# Altium PCB triumvi_integrated.PcbDoc (part 1 of 2)
Units mil, origin at the board's own origin, x right, y up, seen from the top; angles counter-clockwise.
Board outline 3610.03 x 1060.03 mil, 6 copper layers (Top Layer, GND, Signal Layer 2, VCC, GND (Mid4), Bottom Layer), stack 48.468 mil thick; 157 components, 128 nets, 572 pads, 236 vias.
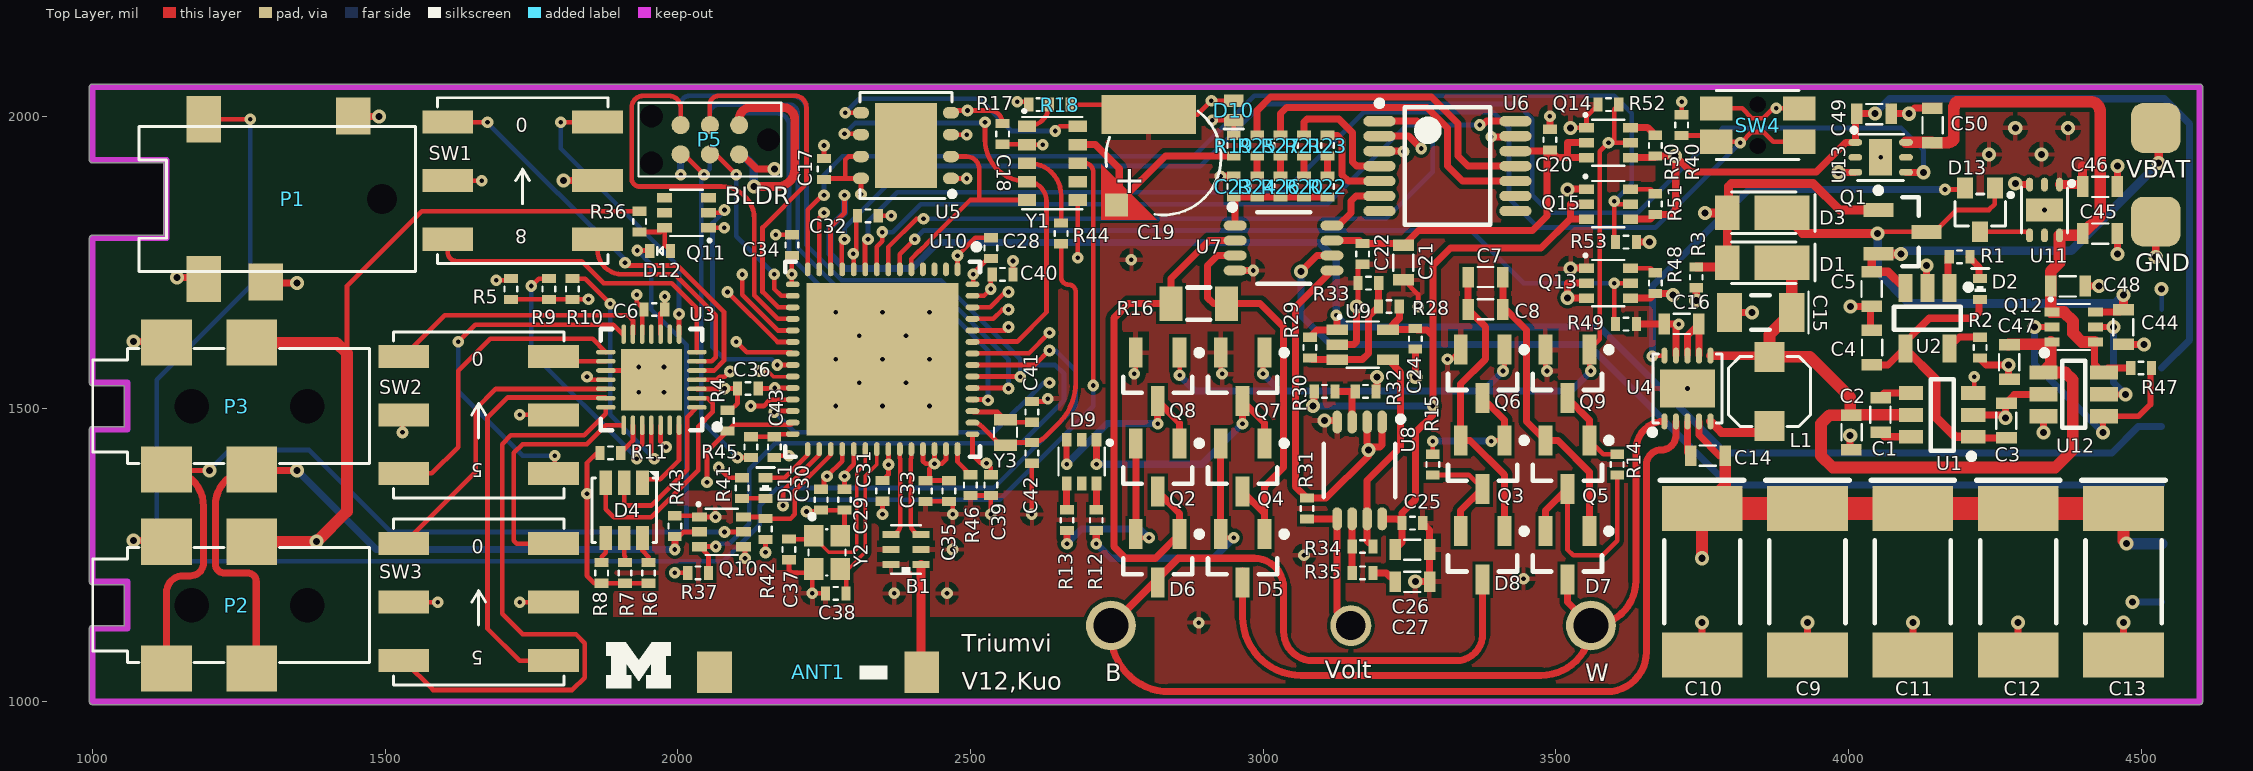
[diagram p0: Top Layer view]
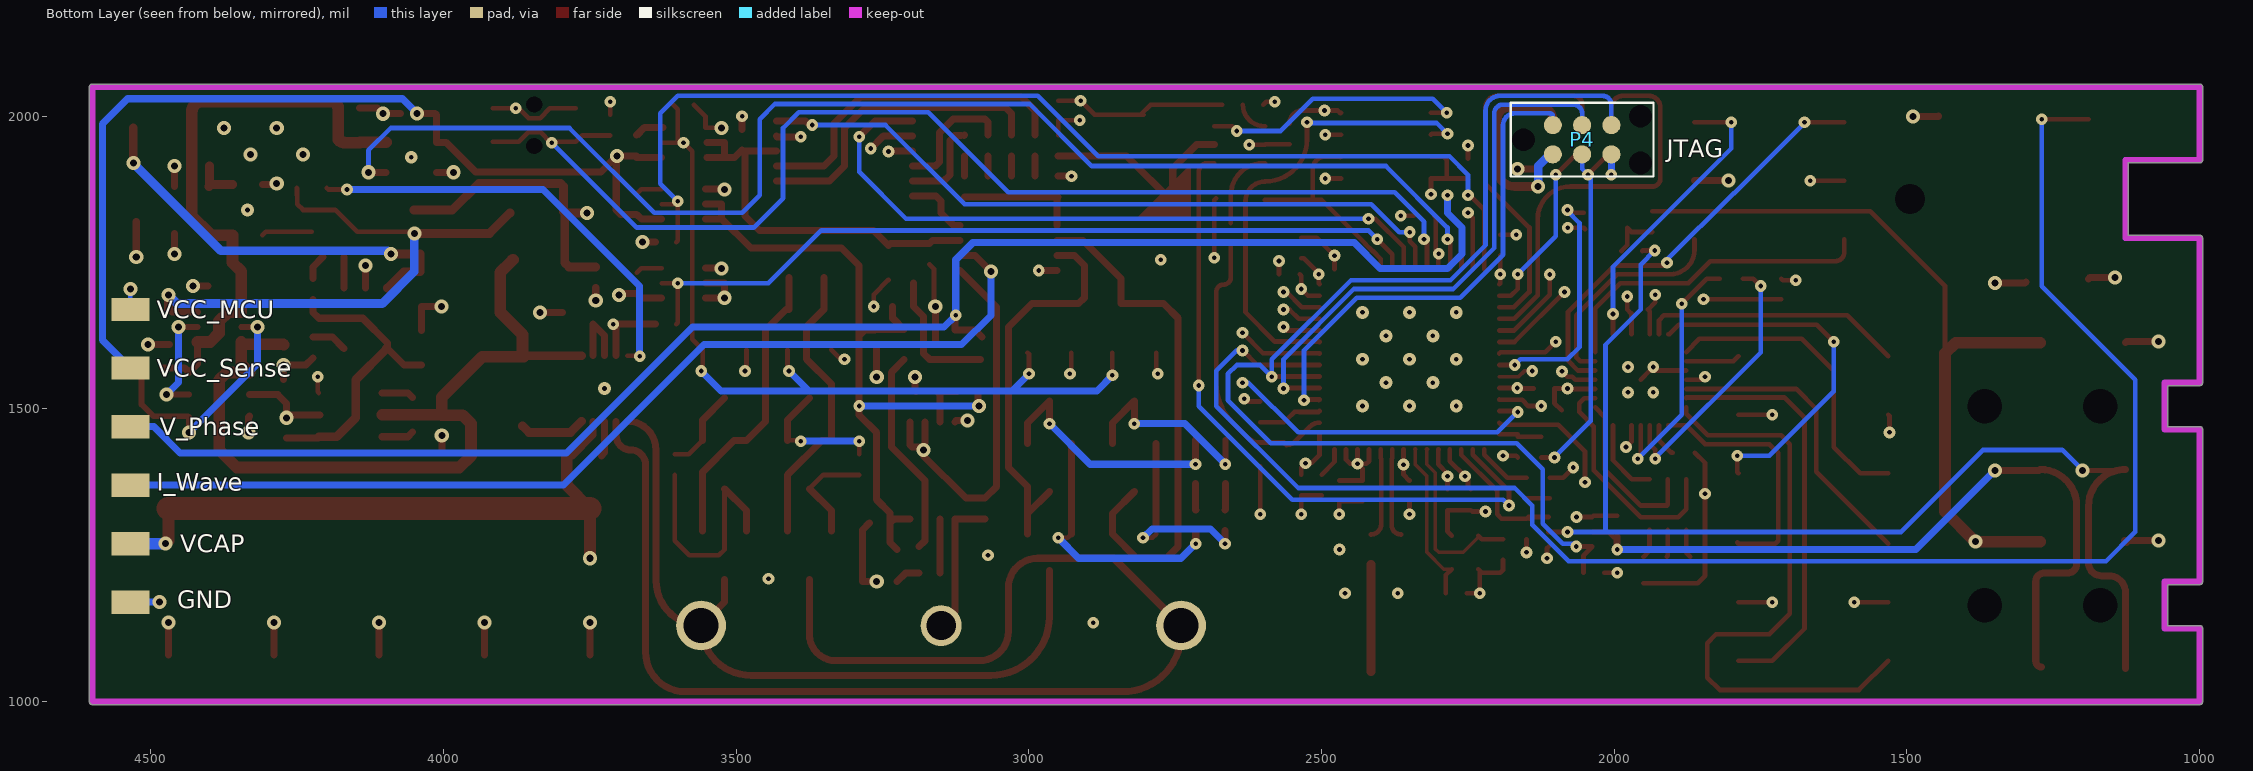
[diagram p1: Bottom Layer view, seen from below]
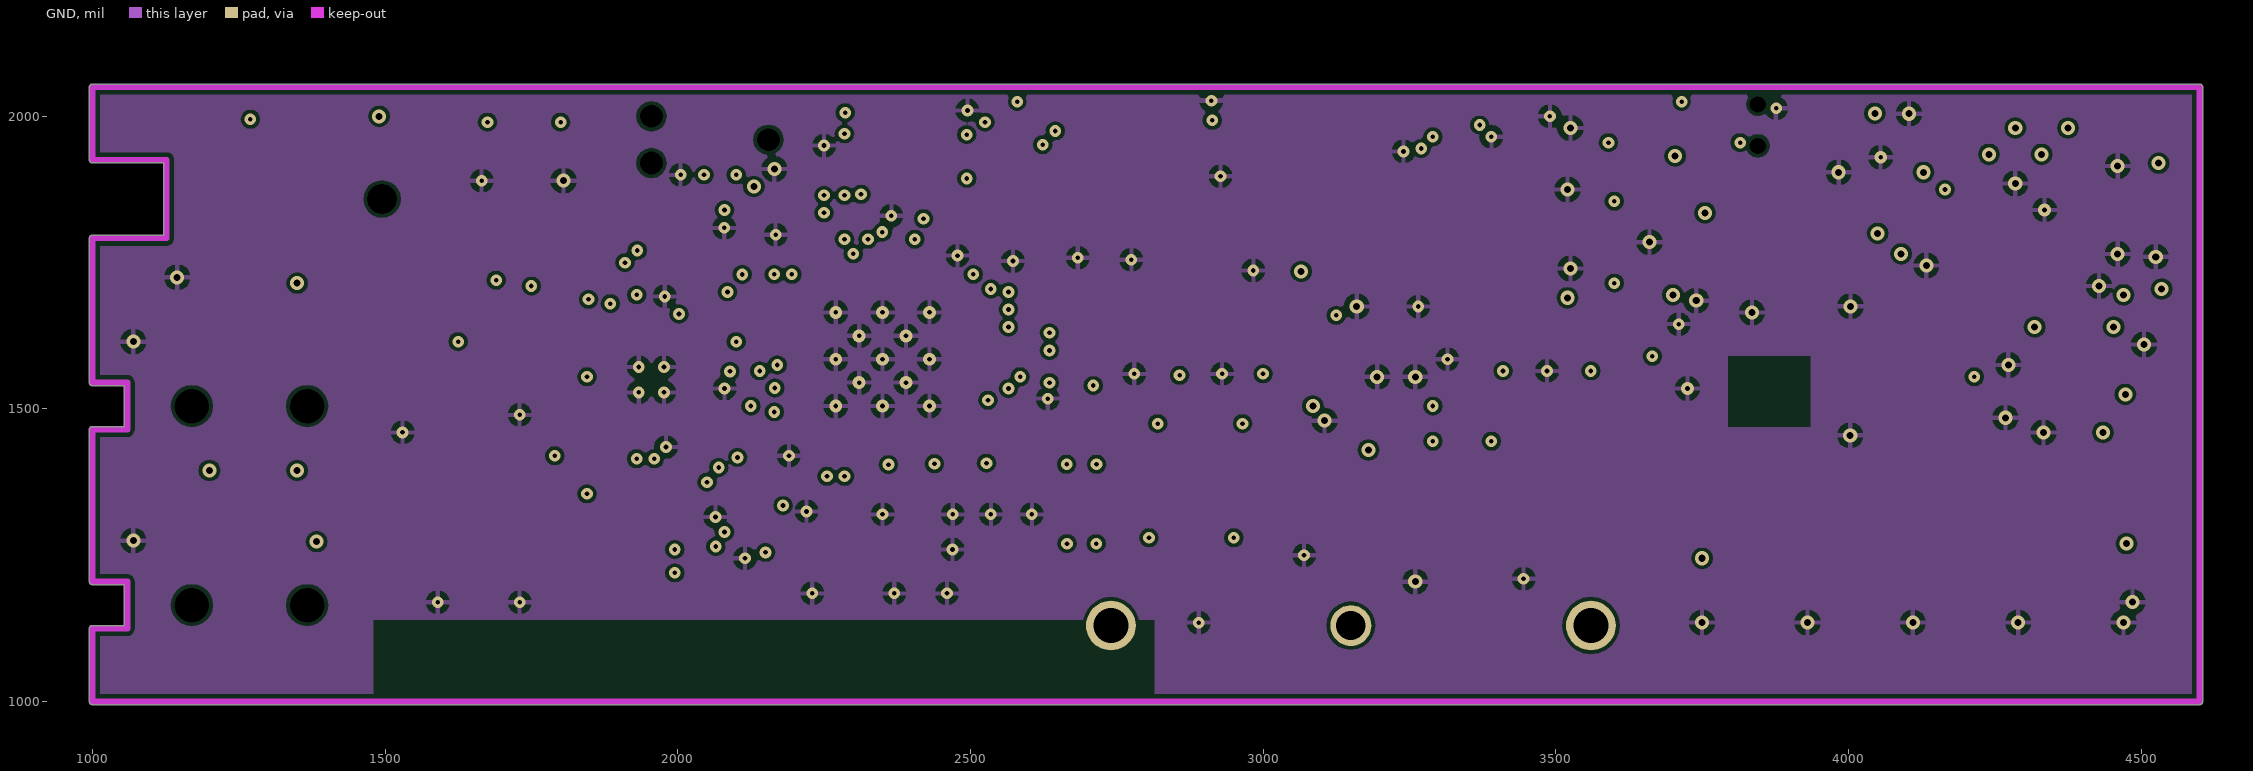
[diagram p2: GND]
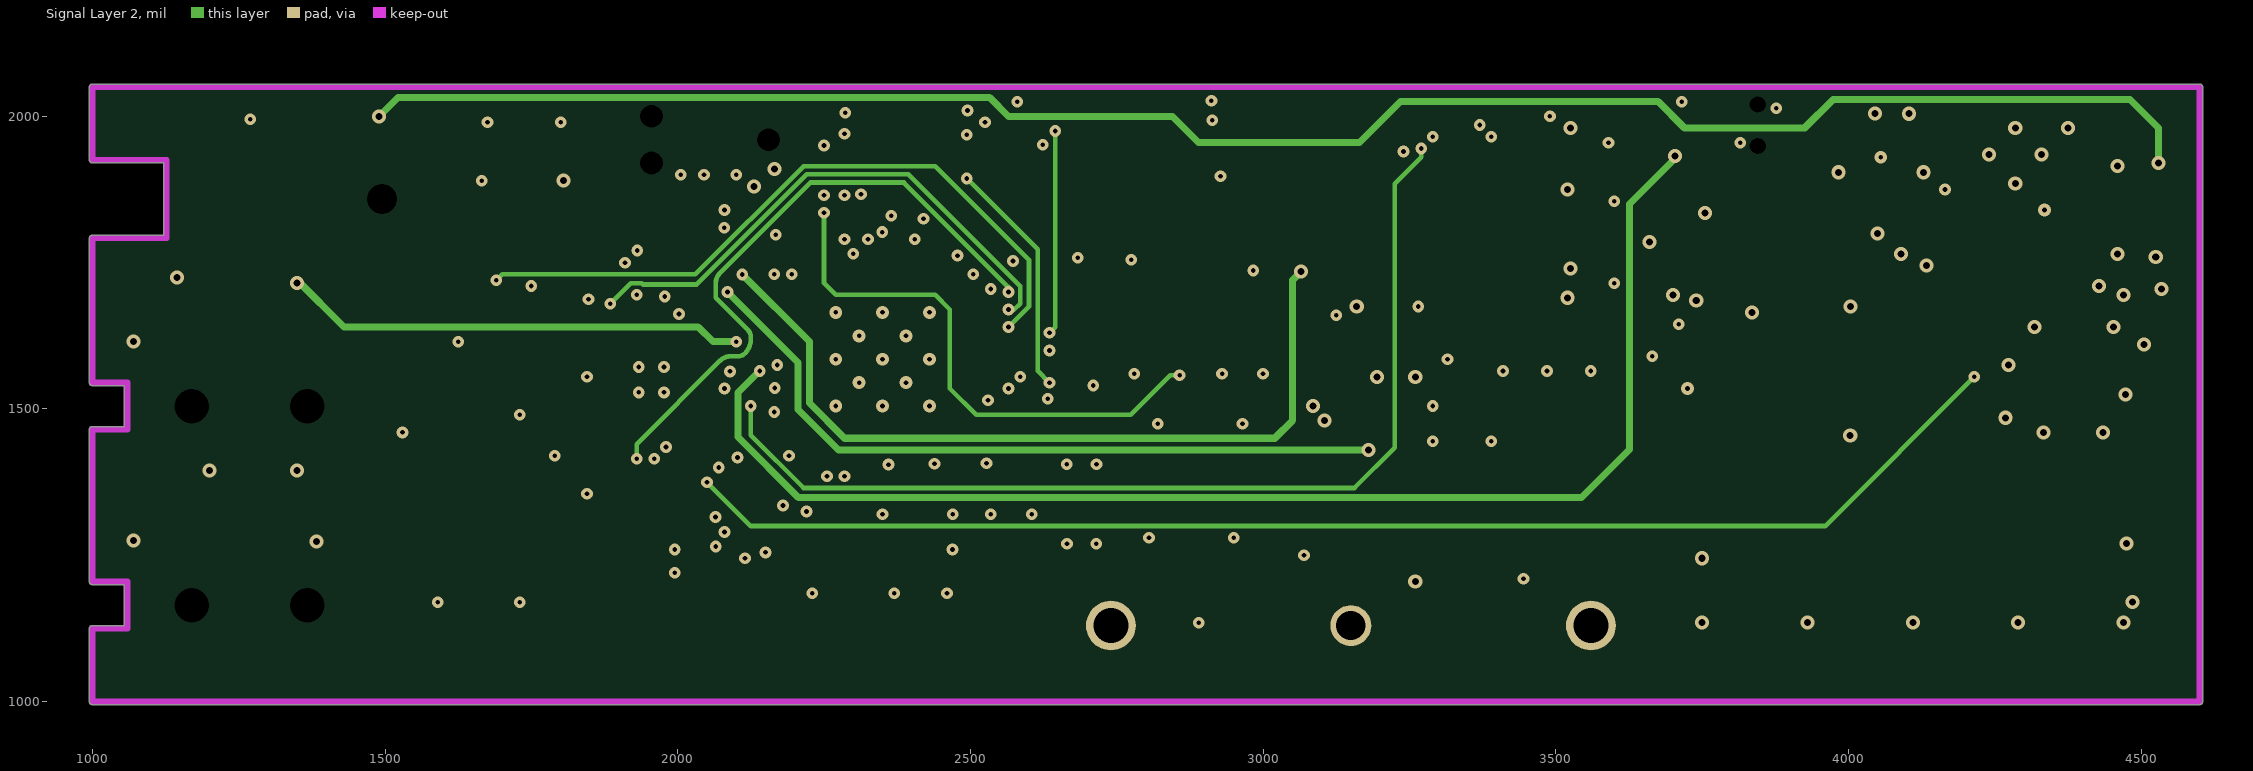
[diagram p3: Signal Layer 2]
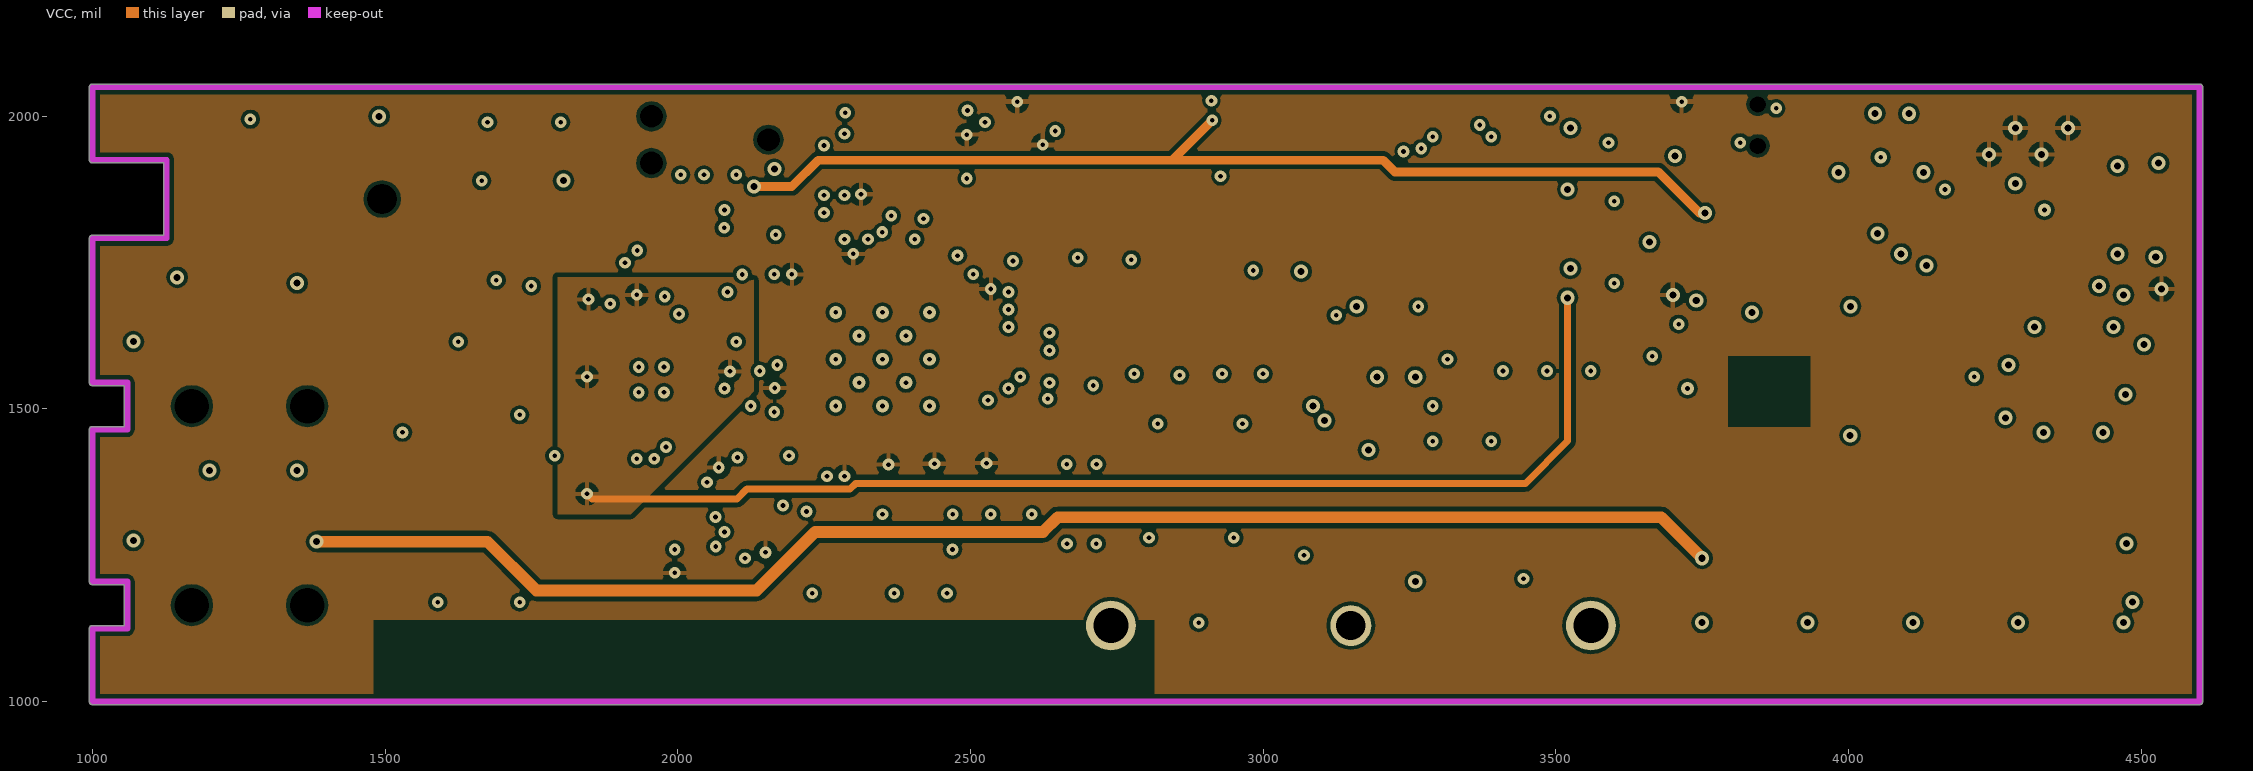
[diagram p4: VCC]
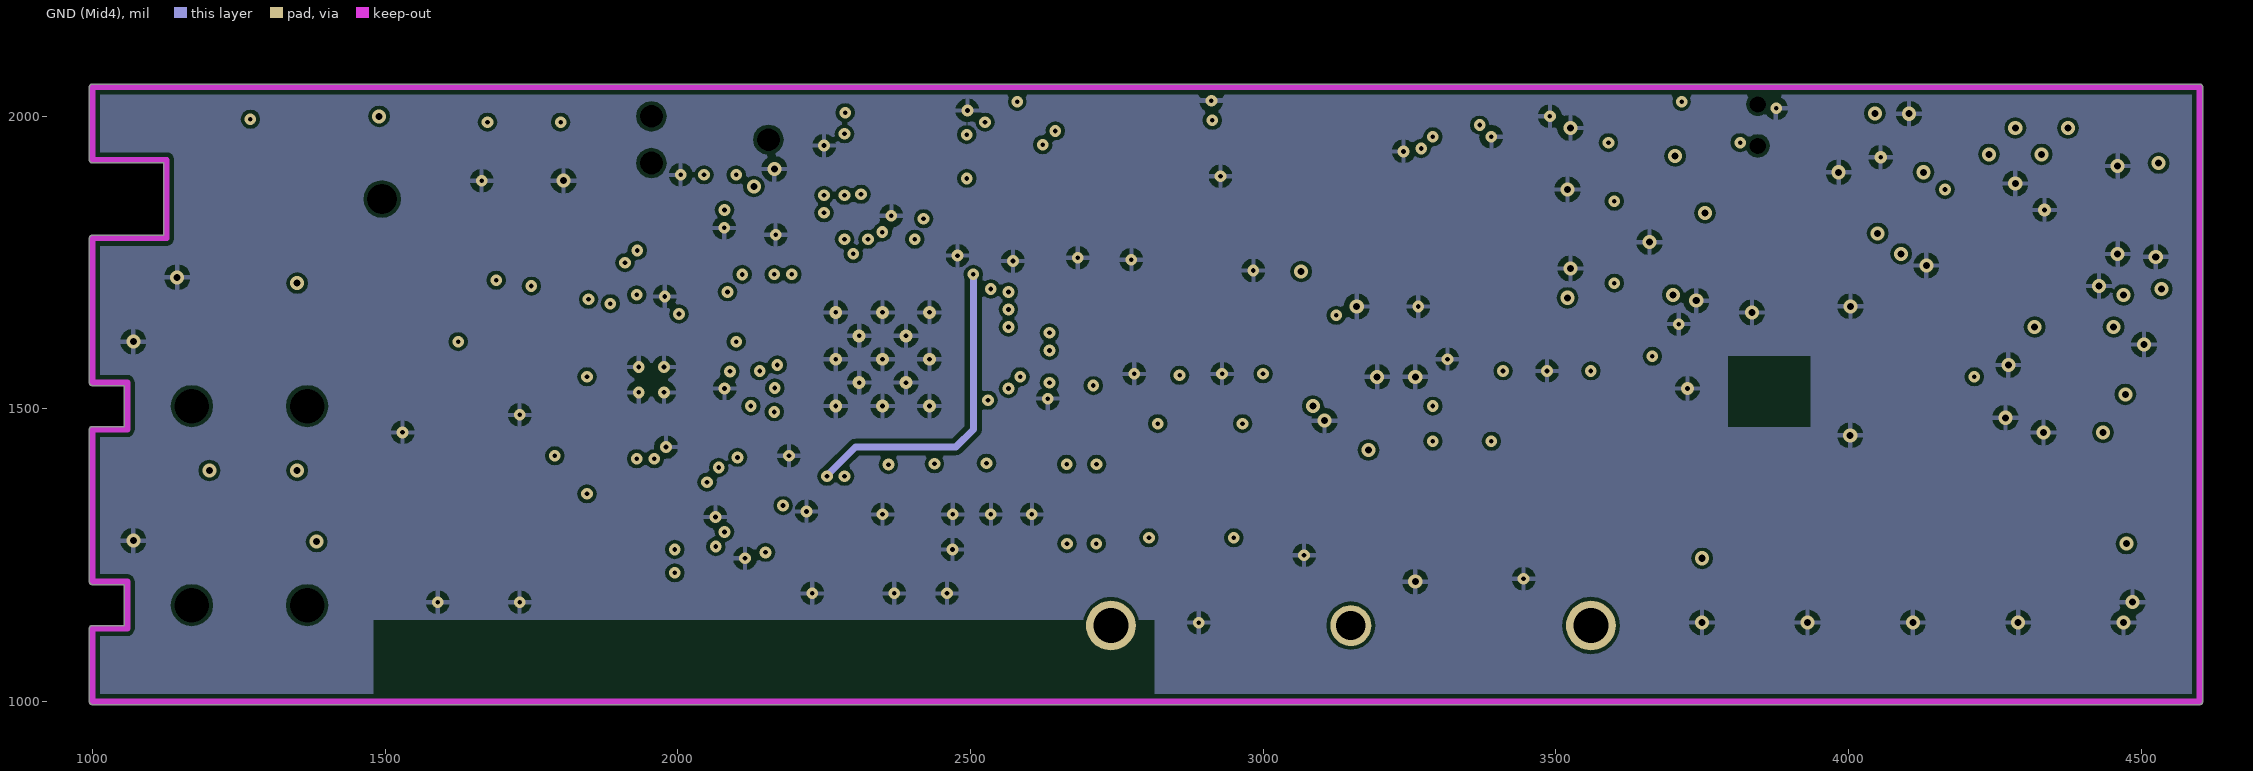
[diagram p5: GND (Mid4)]

## Layer stack, top to bottom
Top Solder: solder mask 0.4, Solder Resist, Dk 3.5
Top Layer: signal copper 1.4
Dielectric 1: core 10, FR-4, Dk 4.2
GND: signal copper 1.417
Dielectric 3: prepreg 5, Dk 4.2
Signal Layer 2: signal copper 1.417
Dielectric 4: core 10, Dk 4.2
VCC: signal copper 1.417
Dielectric 5: prepreg 5, Dk 4.2
GND (Mid4): signal copper 1.417
Dielectric 2: core 10, Dk 4.2
Bottom Layer: signal copper 1.4
Bottom Solder: solder mask 0.4, Solder Resist, Dk 3.5

## Board outline
1000,994.99 cw(c1000,1000) 994.99,1000 994.99,1125 cw(c1000,1125) 1000,1130.02 1054.75,1130.02 1054.75,1199.98 1000,1199.98 cw(c1000,1205) 994.99,1205 994.99,1465 cw(c1000,1465) 1000,1470.02 1054.75,1470.02 1054.75,1539.98 1000,1539.98 cw(c1000,1545) 994.99,1545 994.99,1791.65 cw(c1000,1791.65) 1000,1796.67 1121.99,1796.67 1121.99,1920.5 1000,1920.5 cw(c1000,1925.51) 994.99,1925.51 994.99,2050 cw(c1000,2050) 1000,2055.01 4600,2055.01 cw(c4600,2050) 4605.02,2050 4605.02,1000 cw(c4600,1000) 4600,994.99

## Design rules (kind name [scope] priority, off if disabled: settings)
Clearance "non plated holes" [InPadClass('NPHOLES')] p1: gap=10 // Sunstone Circuits Minimum Clearance Rule (MLB~4&6 Layer Designs)
Clearance "Clearance~Sunstone Circuits" [All] p2: gap=6 except(8: Track-Poly Poly-Poly) // Sunstone Circuits Minimum Clearance Rule (MLB~4&6 Layer Designs)
DiffPairsRouting [All] p1: maxlimit=10 minlimit=10 mostfreqgap=10 toplayer_minwidth=6 toplayer_maxwidth=15 toplayer_prefwidth=15 midlayer1_minwidth=6 midlayer1_maxwidth=15 midlayer1_prefwidth=15 midlayer2_minwidth=6 midlayer2_maxwidth=15 midlayer2_prefwidth=15 midlayer3_minwidth=15 midlayer3_maxwidth=15 midlayer3_prefwidth=15 midlayer4_minwidth=15 midlayer4_maxwidth=15 midlayer4_prefwidth=15 bottomlayer_minwidth=6 bottomlayer_maxwidth=15 bottomlayer_prefwidth=15 maxuncoupledlength=500
HoleSize "HoleSize~Sunstone Circuits" [All] p1: absolutevalues=TRUE maxlimit=251 minlimit=8 maxpercent=80.000 minpercent=20.000 // Sunstone Circuits Hole Size Rule (MLB~4&6 Layer Designs)
HoleSize Testpoint [All] p2: absolutevalues=TRUE maxlimit=100 minlimit=1 maxpercent=80.000 minpercent=20.000
HoleSize TestPointUsage [All] p3: absolutevalues=TRUE maxlimit=100 minlimit=1 maxpercent=80.000 minpercent=20.000
MinimumAnnularRing "MinimumAnnularRing~Sunstone Circuits" [All] p1 off: minimumring=7 // Sunstone Circuits Minimum Annular Ring (MLB~4&6 Layer Designs)
MinimumSolderMaskSliver [All] p1 off: minsoldermaskwidth=10
PlaneClearance "PlaneClearance~Sunstone Circuits" [All] p1: clearance=12 // Sunstone Circuits Power Plane Clearance Rule (MLB~4&6 Layer Designs)
PlaneConnect "PlaneConnect~Sunstone Circuits" [All] p1: planeconnectstyle=Relief reliefexpansion=10 reliefentries=4 reliefconductorwidth=8 reliefairgap=10 // Sunstone Circuits Power Plane Connect Rule (MLB~4&6 Layer Designs)
PolygonConnect "PolygonConnect~Sunstone Circuits" [All] p1: connectstyle=Relief reliefconductorwidth=8 reliefentries=4 polygonreliefangle="90 Angle" airgapwidth=10 // Sunstone Circuits Polygon Connect Style (MLB~4&6 Layer Designs)
RoomDefinition U_programming_header [InComponentClass('U_programming_header')] p1 off: confinementstyle=ConfineIn formatcopy=TRUE lockcomponents=FALSE outline 1920.98,1885.04 1920.98,2034.96 2189.02,2034.96 2189.02,1885.04
RoomDefinition U_power_generation [InComponentClass('U_power_generation')] p2 off: confinementstyle=ConfineIn formatcopy=TRUE lockcomponents=FALSE outline 3517.01,1653.82 3517.01,2017.44 3547.52,2017.44 3547.52,2048.7 3632.48,2048.7 3632.48,2040.67 4177.91,2040.67 4177.91,1914.61 4486.26,1914.61 4486.26,1696.26 4504.61,1696.26 4504.61,1598.7 4542.48,1598.7 4542.48,1541.3 4473.59,1541.3 4473.59,1447.09 4296.41,1447.09 4296.41,1523.74 4240.39,1523.74 4240.39,1616.3 3577.52,1616.3 3577.52,1653.82
RoomDefinition U_fram_rtc [InComponentClass('U_fram_rtc')] p3 off: confinementstyle=ConfineIn formatcopy=TRUE lockcomponents=FALSE outline 2221.3,1867.52 2221.3,1952.48 2286.45,1952.48 2286.45,2053.05 2493.55,2053.05 2493.55,2050.56 2979.73,2050.56 2979.73,1966 2978.7,1966 2978.7,1907.52 2940.93,1907.52 2940.93,1813.7 2710.7,1813.7 2710.7,1829.29 2567.95,1829.29 2567.95,1846.95 2286.45,1846.95 2286.45,1867.52
RoomDefinition U_charging [InComponentClass('U_charging')] p4 off: confinementstyle=ConfineIn formatcopy=TRUE lockcomponents=FALSE outline 2056.3,1437.52 2056.3,1522.48 3711.3,1522.48 3711.3,1767.48 3759.3,1767.48 3759.3,1882.93 4003.66,1882.93 4003.66,1893.31 4181.14,1893.31 4181.14,1788.7 4232.48,1788.7 4232.48,1752.5 4253.7,1752.5 4253.7,1536.26 4304.61,1536.26 4304.61,1423.74 4246.82,1423.74 4246.82,1399.29 4073.18,1399.29 4073.18,1403.74 3970.39,1403.74 3970.39,1437.52
RoomDefinition U_mcu [InComponentClass('U_mcu')] p5 off: confinementstyle=ConfineIn formatcopy=TRUE lockcomponents=FALSE outline 1906.3,1777.52 1906.3,1862.48 1942.99,1862.48 1942.99,1896.18 3686.3,1896.18 3686.3,2027.48 3733.57,2027.48 3733.57,2081.61 3956.43,2081.61 3956.43,1913.44 3956.43,1757.52 2683.7,1757.52 2633.7,1757.52 2633.7,1457.52 2633.7,1377.52 2563.7,1377.52 2563.7,1327.52 2491.89,1327.52 2491.89,1317.25 2459.69,1317.25 2459.69,1000.63 2020.31,1000.63 2020.31,1191.3 1992.52,1191.3 1992.52,1257.52 1966.3,1257.52 1966.3,1741.3 1927.52,1741.3 1927.52,1777.52
RoomDefinition U_IV_sensing [InComponentClass('U_IV_sensing')] p6 off: confinementstyle=ConfineIn formatcopy=TRUE lockcomponents=FALSE outline 2900,1693.15 2900,1864.72 2921.3,1864.72 2921.3,1922.48 2961.3,1922.48 2961.3,1992.48 3151.46,1992.48 3151.46,2042.13 3478.54,2042.13 3478.54,2002.48 3518.7,2002.48 3518.7,1917.52 3478.54,1917.52 3478.54,1793.78 3311.26,1793.78 3311.26,1170.39 3198.74,1170.39 3198.74,1191.3 3127.52,1191.3 3127.52,1260 3083.15,1260 3083.15,1287.52 3046.3,1287.52 3046.3,1693.15
RoomDefinition U_energy_harvesting [InComponentClass('U_energy_harvesting')] p7 off: confinementstyle=ConfineIn formatcopy=TRUE lockcomponents=FALSE outline 3645.12,1440.35 3645.12,1622.76 3658.74,1622.76 3658.74,1679.61 3759.29,1679.61 3759.29,1714.37 3940.71,1714.37 3940.71,1627.65 3947.5,1627.65 3947.5,1393.23 4564.64,1393.23 4564.64,1020.79 3655.35,1020.79 3655.35,1440.35
RoomDefinition U_CT_switch [InComponentClass('U_CT_switch')] p8 off: confinementstyle=ConfineIn formatcopy=TRUE lockcomponents=FALSE outline 2636.3,1267.52 2636.3,1352.48 2638.66,1352.48 2638.66,1472.21 2739.13,1472.21 2739.13,1643.74 2804.21,1643.74 2804.21,1728.39 3323.74,1728.39 3323.74,1759.61 3436.26,1759.61 3436.26,1648.74 3610.71,1648.74 3610.71,1447.48 3633.7,1447.48 3633.7,1362.52 3610.71,1362.52 3610.71,1161.26 3055.71,1161.26 3055.71,1156.26 2739.13,1156.26 2739.13,1267.52
RoomDefinition U_config [InComponentClass('U_config')] p9 off: confinementstyle=ConfineIn formatcopy=TRUE lockcomponents=FALSE outline 987.26,1004.36 987.26,1665.64 1550.74,1665.64 1550.74,2044.23 1919.26,2044.23 1919.26,1698.7 2002.48,1698.7 2002.48,1663.35 2087.05,1663.35 2087.05,1436.65 1978.7,1436.65 1978.7,1187.52 1844.26,1187.52 1844.26,1015.77 1485.65,1015.77 1485.65,1004.36
RoutingVias "RoutingVias~Sunstone Circuits" [All] p1: holewidth=16 width=30 viastyle="Through Hole" minholewidth=6 minwidth=20 maxholewidth=20 maxwidth=40 // Sunstone Circuits Routing Vias Rule (MLB~4&6 Layer Designs)
ShortCircuit "ShortCircuit~Sunstone Circuits" [All] p1: allowed=FALSE // Sunstone Circuits Short Circuit Rule~Do Not Allow (MLB~4&6 Layer Designs)
SilkToSilkClearance [All] p1 off: silktosilkclearance=10
SilkToSolderMaskClearance [IsPad] p1 off: minsilkscreentomaskgap=10 clearancetoexposedcopper=TRUE
SolderMaskExpansion TentVias [isVia] p1: expansion=-20 // Sunstone Circuits Solder Mask Expansion Rule (MLB~4&6 Layer Designs)
SolderMaskExpansion "SolderMaskExpansion~Sunstone Circuits" [All] p2: expansion=3 // Sunstone Circuits Solder Mask Expansion Rule (MLB~4&6 Layer Designs)
ViasUnderSMD "ViasUnderSMD~Sunstone Circuits" [All] p1: allowed=FALSE // Sunstone Circuits Vias Under SMD~Do Not Allow (MLB~4&6 Layer Designs)
Width "Width~Sunstone Circuits" [All] p1: maxlimit=100 minlimit=6 preferedwidth=10 // Sunstone Circuits Minimum Width Rule (MLB~4&6 Layer Designs)
22 further rules are at their usual default settings.

## Classes and differential pairs
component class U_programming_header: P4 P5
component class U_power_generation: C44 C45 C46 C47 C48 C49 C50 D13 Q12 Q13 Q14 Q15 R47 R48 R49 R50 R51 R52 R53 U11 U12 U13
component class U_mcu: ANT1 B1 C28 C29 C30 C31 C32 C33 C34 C35 C36 C37 C38 C39 C40 C41 C42 C43 D11 D12 Q10 Q11 R36 R37 R40 R41 R42 R43 R44 R45 R46 SW4 U10 Y2 Y3
component class U_IV_sensing: C20 C21 C22 C23 C24 C25 C26 C27 R20 R21 R22 R23 R24 R25 R26 R27 R28 R29 R30 R31 R32 R33 R34 R35 U6 U7 U8 U9
component class U_fram_rtc: C17 C18 C19 D10 R17 R18 R19 U5 Y1
component class U_energy_harvesting: C9 C10 C11 C12 C13 C14 C15 C16 L1 U4
component class U_CT_switch: C7 C8 D5 D6 D7 D8 D9 Q2 Q3 Q4 Q5 Q6 Q7 Q8 Q9 R12 R13 R14 R15 R16
component class U_config: C6 D4 P1 P2 P3 R5 R6 R7 R8 R9 R10 R11 SW1 SW2 SW3 U3
component class U_charging: C1 C2 C3 C4 C5 D1 D2 D3 Q1 R1 R2 R3 R4 U1 U2
differential pair CC2538_RF: +CC2538_RF_P -CC2538_RF_N

## Components (designator, comment, footprint, x,y, rotation, side; value= is the part's Value field where it differs from the comment)
ANT1 "2450AT45A100" 2450AT45A100 2240,1050 r180 top
B1 "2450BM15A0002E" 2450BM15A0002 2390,1260 r180 top
C1 "1u" 0603 4055,1490 r270 top
C2 "1u" 0603 4005,1460 r90 top
C3 "1u" 0603 4270,1480 r270 top
C4 "4.7u" 0603 4040,1605 r90 top
C5 "4.7u" 0603 4040,1705 r270 top
C6 "0.1u" 0402 1960,1670 r0 top
C7 "0.068u" 0603 3380,1725 r180 top
C8 "10000p" 0603 3380,1670 r180 top
C9 "220u" 2917 3930,1205 r270 top
C10 "220u" 2917 3750,1205 r270 top
C11 "220u" 2917 4110,1205 r270 top
C12 "220u" 2917 4290,1205 r270 top
C13 "220u" 2917 4470,1205 r270 top
C14 "1u" 0603 3760,1420 r180 top
C15 "100u" "1206 - POLAR MARKING" 3850,1665 r180 top
C16 "4.7u" 0603 3715,1645 r180 top
C17 "0.1u" 0402 2250,1910 r90 top
C18 "0.1u" 0402 2555,1970 r90 top
C19 "80m" XH414HG-IV01E 2830,1930 r180 top
C20 "0.1u" 0402 3490,1960 r90 top
C21 "10u" 0603 3240,1750 r270 top
C22 "0.1u" 0402 3170,1765 r270 top
C23 "18p" 0402 2950,1880 r90 top
C24 "0.1u" 0402 3260,1620 r270 top
C25 "0.1u" 0402 3255,1305 r0 top
C26 "10u" 0603 3255,1260 r0 top
C27 "10u" 0603 3255,1205 r0 top
C28 "0.1u" 0402 2535,1775 r90 top
C29 "0.1u" 0402 2285,1345 r270 top
C30 "0.1u" 0402 2245,1345 r270 top
C31 "0.1u" 0402 2350,1360 r270 top
C32 "0.1u" 0402 2325,1830 r0 top
C33 "0.1u" 0402 2423.19,1359.73 r270 top
C34 "0.1u" 0402 2195,1780 r90 top
C35 "220p" 0402 2463.19,1359.73 r270 top
C36 "0.1u" 0402 2120,1535 r180 top
C37 "12p" 0402 2190,1260 r270 top
C38 "12p" 0402 2270,1185 r180 top
C39 "0.1u" 0402 2535,1370 r270 top
C40 "0.1u" 0402 2555,1730 r0 top
C41 "22p" 0402 2605,1495 r90 top
C42 "22p" 0402 2605,1425 r270 top
C43 "1000p" 0402 2165,1435 r270 top
C44 "4.7u" 0603 4470,1640 r270 top
C45 "4.7u" 0603 4430,1800 r0 top
C46 "4.7u" 0603 4430,1880 r0 top
C47 "4.7u" 0603 4275,1580 r270 top
C48 "10u" 0603 4375,1710 r0 top
C49 "4.7u" 0603 4043.78,2004.41 r0 top
C50 "4.7u" 0603 4143.31,1984.41 r90 top
D1 "DFLS130L" PowerDI123 3855,1750 r0 top
D2 "APG1005CGC-T" "0402 - LED" 4225,1705 r90 top
D3 "DFLS130L" PowerDI123 3855,1835 r0 top
D4 "CLY6D-FKC" PLCC6 1908.5,1326.69 r270 top
D5 "D_BAS40-04" SOT23-3 2965,1245 r270 top
D6 "D_BAS40-04" SOT23-3 2820,1245 r270 top
D7 "D_BAS40-04" SOT23-3 3520,1250 r270 top
D8 "D_BAS40-04" SOT23-3 3375,1250 r270 top
D9 "BAS40TW" SOT-363 2690,1410 r180 top
D10 "CZRER52C3V6" 0503/SOD-723F 2950,2010 r270 top
D11 "LED, Red" "0402 - LED" 2150,1365 r90 top
D12 "CDBQR0130L" "0402 - DIODE" 1970,1770 r180 top
D13 "BAV70W-7-F" SOT323 4225,1840 r180 top
L1 "10u" CDRH2D18 3865,1530 r270 top
P1 "PJ3516S-041" PJ3516S-041 1079.76,1858.58 r0 top
P2 "PJ2505S-041" PJ2505S-041 1059.76,1165 r0 top
P3 "PJ2505S-041" PJ2505S-041 1059.76,1505 r0 top
P4 "TC2030" TC2030-IDC-NLFP 2055,1960 r180 bottom
P5 "TC2030" TC2030-IDC-NLFP 2055,1960 r180 top
Q1 "Si2369DS" SOT23-3 4092.4,1802.6 r0 top
Q2 "Si2367DS" SOT23-3 2820,1400 r270 top
Q3 "Si2342DS" SOT23-3 3375,1405 r270 top
Q4 "Si2367DS" SOT23-3 2965,1400 r270 top
Q5 "Si2342DS" SOT23-3 3520,1405 r270 top
Q6 "Si2338DS" SOT23-3 3375,1560 r270 top
Q7 "Si2338DS" SOT23-3 2965,1555 r270 top
Q8 "Si2338DS" SOT23-3 2820,1555 r270 top
Q9 "Si2338DS" SOT23-3 3520,1560 r270 top
Q10 "DMN2004DWK" SC70-6 2075,1290 r270 top
Q11 "DMN2004DWK" SC70-6 2015,1835 r90 top
Q12 "Si1965DH" SC70-6 4385,1640 r270 top
Q13 "Si1865DDL" SC70-6 3590,1715 r270 top
Q14 "Si1865DDL" SC70-6 3590,1955 r270 top
Q15 "Si1865DDL" SC70-6 3590,1850 r270 top
R1 "910" 0402 4190,1760 r180 top
R2 "47k" 0402 4225,1605 r270 top
R3 "47k" 0402 3740,1725 r270 top
R4 "1Meg" 0402 2085,1480 r90 top
R5 "100k" 0402 1715,1705 r90 top
R6 "110" 0402 1950,1220 r90 top
R7 "220" 0402 1910,1220 r90 top
R8 "324" 0402 1870,1220 r90 top
R9 "10k" 0402 1780,1705 r90 top
R10 "10k" 0402 1820,1705 r90 top
R11 "100k" 0402 1885,1425 r0 top
R12 "47k" 0402 2715,1310 r90 top
R13 "47k" 0402 2665,1310 r90 top
R14 "1Meg" 0402 3605,1405 r90 top
R15 "1Meg" 0402 3290,1405 r90 top
R16 "20" 0805 2890,1680 r180 top
R17 "10k" 0402 2617.28,2020 r180 top
R18 "10k" 0402 2652.28,2020 r180 top
R19 "10k" 0402 2950,1950 r270 top
R20 "910" 0402 3070,1880 r90 top
R21 "48.7k" 0402 3070,1950 r90 top
R22 "324" 0402 3110,1880 r90 top
R23 "24.3k" 0402 3110,1950 r90 top
R24 "20" 0402 2990,1880 r90 top
R25 "12.1k" 0402 2990,1950 r90 top
R26 "110" 0402 3030,1880 r90 top
R27 "5.76k" 0402 3030,1950 r90 top
R28 "100k" 0402 3215,1675 r180 top
R29 "2Meg" 0402 3080,1605 r90 top
R30 "1Meg" 0402 3105,1530 r0 top
R31 "100k" 0402 3075,1330 r270 top
R32 "1Meg" 0402 3175,1530 r0 top
R33 "100k" 0402 3180,1715 r180 top
R34 "47k" 0402 3170,1265 r0 top
R35 "100" 0402 3170,1220 r0 top
R36 "47k" 0402 1935,1820 r270 top
R37 "1Meg" 0402 2035,1220 r0 top
R40 "1Meg" 0402 3715,1985 r270 top
R41 "2.2k" 0402 2110,1365 r90 top
R42 "1Meg" 0402 2150,1295 r90 top
R43 "1Meg" 0402 1995,1300 r90 top
R44 "0" 0402 2655,1800 r90 top
R45 "2.2k" 0402 2125,1435 r270 top
R46 "56k" 0402 2500,1370 r270 top
R47 "470k" 0402 4500,1570 r0 top
R48 "1Meg" 0402 3670,1715 r90 top
R49 "1Meg" 0402 3620,1645 r0 top
R50 "1Meg" 0402 3670,1950 r90 top
R51 "1Meg" 0402 3670,1850 r90 top
R52 "1Meg" 0402 3590,2020 r180 top
R53 "1Meg" 0402 3620,1785 r0 top
SW1 "SH-7050TA" SH-7050A 1735,1890 r0 top
SW2 "SH-7010TA" SH-7010A 1660,1490 r0 top
SW3 "SH-7010TA" SH-7010A 1660,1170 r0 top
SW4 "EVQP7C" EVQP7C 3845,1985 r180 top
U1 "LTC3200-5" SOT23-6 4160,1490 r180 top
U2 "MCP73831" TSOT23-5 4135,1655 r270 top
U3 "SX1509B" QFN40P400X400X60_HS-29N 1955,1550 r180 top
U4 "LTC3588EDD-1#PBF" QFN-10 3725,1535 r90 top
U5 "FM25V02A-DGTR" TDFN-8 2390,1950 r180 top
U6 "ADG604" TSSOP-14 3315,1915 r0 top
U7 "INA333" MSOP-8 3035,1775 r0 top
U8 "MCP6032" MSOP-8 3165,1395 r270 top
U9 "TS881" SC70-5 3170,1610 r270 top
U10 "CC2538" QFN56 2350,1585 r270 top
U11 "ADP151_LFCSP" CP-6-3 4335,1840 r270 top
U12 "LTC4412" TSOT-23 4385,1525 r0 top
U13 "ADP151_LFCSP" CP-6-3 4055,1930 r0 top
Y1 "RV-3049-C3" RV-3049-C3 2640,1920 r270 top
Y2 "FA-128" FA-128 2255,1255 r270 top
Y3 "ABS05" ABS05 2560,1460 r90 top

## Footprints (in the part's own frame and the unit in brackets; to place one, negate y for a bottom-side part, rotate by r counter-clockwise, add the part's x,y. Pads: shape width x height; smd on the part's side, far side on the other; paste and mask are expansions set on the pad)
0402 [mm] "2-Leads, Body 1.00x0.50mm, IPC Medium Density"
  rect 0.4x0.6 smd: 1(-0.45,0) 2(0.45,0)
  silkscreen extent -0.1,-0.28 0.1,0.28, body extent -0.53,-0.28 0.53,0.27, height 0.4
"0402 - DIODE" [mm] "2-Leads, Body 1.00x0.50mm, IPC Medium Density"
  rect 0.4x0.6 smd: 1(-0.45,0) 2(0.45,0)
  silkscreen extent -0.13,-0.18 0.13,0.18, body extent -0.53,-0.28 0.53,0.27, height 0.4
"0402 - LED" [mm] "2-Leads, Body 1.00x0.50mm, IPC Medium Density"
  rect 0.4x0.6 smd: 1(-0.45,0) 2(0.45,0)
  silkscreen extent -0.13,-0.38 0.89,0.38, body extent -0.53,-0.28 0.53,0.27, height 0.4
0503/SOD-723F [mm]
  rect 0.55x0.85 smd: 1(-0.425,0) 2(0.425,0)
  silkscreen extent 0.8,-0.43 0.8,0.43, body extent -0.58,-0.33 0.58,0.33, height 0.6
0603 [mm] "2-Leads, Body 1.55x0.85mm, IPC Medium Density"
  rect 0.5x0.9 smd: 1(-0.75,0) 2(0.75,0)
  silkscreen extent -0.35,-0.45 0.35,0.43, body extent -0.75,-0.42 0.75,0.43, height 0.5
0805 [mm] "Chip Resistor, Body 2.0x1.2mm, IPC Low Density"
  rect 1x1.5 smd: 1(-1.2,0) 2(1.2,0)
  silkscreen extent -0.5,-0.7 0.5,0.7, body extent -1.07,-0.7 1.07,0.7, height 0.7
"1206 - POLAR MARKING" [mm]
  rect 1.1x1.7 smd: 1(-1.35,0) 2(1.35,0)
  silkscreen extent -2.07,-0.9 0.4,0.91, body extent -1.58,-0.83 1.58,0.82, height 1.59
2450AT45A100 [mm] "Johnson Technology 2.4 GHz chip antenna"
  rect 1.5x1.8 smd: 1(-4.5,0) ""(4.5,0)
  silkscreen extent -3,-0.3 -1.8,0.3, body extent -4.8,-1 4.8,1, height 1.2
2450BM15A0002 [mm] "Chip Array, Flat, 6-Leads, Pitch 0.65mm,  Body 2.00x1.25mm,  IPC Medium Density"
  rect 0.75x0.3 smd: 1(-0.65,0.65) 2(-0.65,0) 3(-0.65,-0.65) 4(0.65,-0.65) 5(0.65,0) 6(0.65,0.65)
  silkscreen extent -0.65,-1.05 0.65,1.05, body extent -0.67,-1.05 0.67,1.05, height 0.81
2917 [mm] "Chip Capacitor, 2-Leads, Body 7.30x3.20mm, IPC Medium Density"
  rect 1.95x3.5 smd: 1(-3.175,0) 2(3.175,0)
  silkscreen extent -4.4,-1.8 1.8,1.8, body extent -3.65,-2.15 3.65,2.15, height 4.31
ABS05 [mm] "ABS05 Crystal"
  rect 0.5x1 smd: 1(-0.55,0) 2(0.55,0)
  silkscreen extent -0.2,-0.5 0.2,0.5, body extent -0.8,-0.5 0.8,0.5, height 0.5
CDRH2D18 [mm] "Sumdia SMD power inductor"
  rect 1.3x1.3 smd: 1(-1.5,0) 2(1.5,0)
  silkscreen extent -1.52,-1.78 1.52,1.78, body extent -1.5,-1.7 1.5,1.8, height 2
CP-6-3 [mm] "QFN, 6-Leads, Body 2.00x2.00mm, Pitch 0.65mm, Thermal Pad 1.00x1.55mm, IPC Medium Density"
  oval 0.6x0.3 smd: 1(-1.1,0.65) 2(-1.1,0) 3(-1.1,-0.65) 4(1.1,-0.65) 5(1.1,0) 6(1.1,0.65)
  rect 1x1.6 smd: 7(0,0)
  silkscreen extent -1.25,-1 1,1.27, body extent -1,-1 1,1, height 0.6
EVQP7C [mm] "Panasonic EVQP7 tactile button"
  rect 1.4x1.05 smd: 1(-1.8,0.725) 1(1.8,0.725) 2(-1.8,-0.725) 2(1.8,-0.725)
  round 0 hole 0.7 unplated: ""(0,0.9) ""(0,-0.9)
  silkscreen extent -1.8,-1.5 1.8,1.5, body extent -1.8,-2.2 1.8,1.5, height 1.35
FA-128 [mm] "Seiko Epson FA-128 Crystal"
  rect 0.95x0.85 smd: 1(-0.725,-0.575) 2(0.725,-0.575) 3(0.725,0.575) 4(-0.725,0.575)
  silkscreen extent -1.63,-0.8 1,0.8, body extent -1,-0.8 1,0.8, height 0.5
MSOP-8 [mm] "TSOP, 8-Leads, Body 3.00x3.00mm, Pitch 0.65mm, Thermal Pad 1.80x1.50mm, IPC Medium Density"
  oval 1x0.42 smd: 1(-2.1,0.975) 2(-2.1,0.325) 3(-2.1,-0.325) 4(-2.1,-0.975) 5(2.1,-0.975) 6(2.1,-0.325) 7(2.1,0.325) 8(2.1,0.975)
  silkscreen extent -2.35,-1.55 1.15,1.9, body extent -1.55,-1.55 1.55,1.55, height 1.1
PJ2505S-041 [mm] "2.5 mm phone jack, 4 terminals"
  rect 2.2x2 smd: 1(1.7,2.75) 2(1.7,-2.75) 3(5.4,2.75) 4(5.4,-2.75)
  round 0 hole 1.5 unplated: ""(2.8,0) ""(7.8,0)
  Keep-Out Layer lines w0.127: -1.524,-1.016 0,-1.016 0,1.016 -1.524,1.016
  silkscreen extent -1.5,-2.5 10.5,2.5, body extent -1.5,-3.1 10.5,2.9, height 3.7
PJ3516S-041 [mm] "Switchtech Enterprise LTD. 3.5mm phone jack"
  rect 1.5x2 smd: 1(2.8,-3.465) 2(2.8,3.465)
  rect 1.5x1.6 smd: 3(5.5,-3.6) 4(9.3,3.6)
  rect 0x0 hole 1.3 unplated: ""(10.55,0)
  Keep-Out Layer lines w0.254: -2,-1.7 1.2,-1.7 1.2,1.7 -2,1.7
  silkscreen extent 0,-3.15 12,3.15, body extent -2,-3.15 12,3.15, height 4.5
PLCC6 [mm] "CREE PLCC6 LED"
  rect 1.05x0.55 smd: 1(-1.2,0.8) 2(-1.2,0) 3(-1.2,-0.8) 4(1.2,-0.8) 5(1.2,0) 6(1.2,0.8)
  silkscreen extent -1.7,-1.4 1.4,1.5, body extent -1.7,-1.4 1.7,1.4, height 1.85
PowerDI123 [mm] "Diodes PowerDI123 pacakge"
  rect 1.05x1.5 smd: 1(-1.575,0)
  rect 2.4x1.5 smd: 2(0.8,0)
  silkscreen extent -1.4,-0.9 2.22,0.9, body extent -1.85,-0.9 1.85,0.9, height 1
QFN40P400X400X60_HS-29N [mm] "QFN, 28-Leads, Body 4.00x4.00mm, Pitch 0.40mm, Thermal Pad 2.65x2.65mm, IPC Medium Density"
  oval 0.85x0.2 smd: 1(-1.975,1.2) 2(-1.975,0.8) 3(-1.975,0.4) 4(-1.975,0) 5(-1.975,-0.4) 6(-1.975,-0.8) 7(-1.975,-1.2) 15(1.975,-1.2) 16(1.975,-0.8) 17(1.975,-0.4) 18(1.975,0) 19(1.975,0.4) 20(1.975,0.8) 21(1.975,1.2)
  oval 0.2x0.85 smd: 8(-1.2,-1.975) 9(-0.8,-1.975) 10(-0.4,-1.975) 11(0,-1.975) 12(0.4,-1.975) 13(0.8,-1.975) 14(1.2,-1.975) 22(1.2,1.975) 23(0.8,1.975) 24(0.4,1.975) 25(0,1.975) 26(-0.4,1.975) 27(-0.8,1.975) 28(-1.2,1.975)
  rect 2.65x2.65 smd: 29(0,0)
  silkscreen extent -2.98,-2.2 2.2,2.2, body extent -2.05,-2.05 2.05,2.05, height 0.6
QFN56 [mm] "QFN, 56-Leads, Body 8.00x8.00mm, Pitch 0.50mm, Thermal Pad 6.60x6.60mm, IPC Medium Density"
  oval 0.6x0.25 smd: 1(-3.9,3.25) 2(-3.9,2.75) 3(-3.9,2.25) 4(-3.9,1.75) 5(-3.9,1.25) 6(-3.9,0.75) 7(-3.9,0.25) 8(-3.9,-0.25) 9(-3.9,-0.75) 10(-3.9,-1.25) 11(-3.9,-1.75) 12(-3.9,-2.25) 13(-3.9,-2.75) 14(-3.9,-3.25) 29(3.9,-3.25) 30(3.9,-2.75) 31(3.9,-2.25) 32(3.9,-1.75) 33(3.9,-1.25) 34(3.9,-0.75) 35(3.9,-0.25) 36(3.9,0.25) 37(3.9,0.75) 38(3.9,1.25) 39(3.9,1.75) 40(3.9,2.25) 41(3.9,2.75) 42(3.9,3.25)
  oval 0.25x0.6 smd: 15(-3.25,-3.9) 16(-2.75,-3.9) 17(-2.25,-3.9) 18(-1.75,-3.9) 19(-1.25,-3.9) 20(-0.75,-3.9) 21(-0.25,-3.9) 22(0.25,-3.9) 23(0.75,-3.9) 24(1.25,-3.9) 25(1.75,-3.9) 26(2.25,-3.9) 27(2.75,-3.9) 28(3.25,-3.9) 43(3.25,3.9) 44(2.75,3.9) 45(2.25,3.9) 46(1.75,3.9) 47(1.25,3.9) 48(0.75,3.9) 49(0.25,3.9) 50(-0.25,3.9) 51(-0.75,3.9) 52(-1.25,3.9) 53(-1.75,3.9) 54(-2.25,3.9) 55(-2.75,3.9) 56(-3.25,3.9)
  rect 6.6x6.6 smd: 57(0,0)
  silkscreen extent -5,-4.22 4.22,4.23, body extent -4.08,-4.07 4.07,4.08, height 1
QFN-10 [mm] "QFN, 10-Leads, Body 4.00x4.00mm, Pitch 0.50mm, Thermal Pad 1.65x2.38mm, IPC Medium Density"
  oval 0.7x0.25 smd: 1(-1.425,1) 2(-1.425,0.5) 3(-1.425,0) 4(-1.425,-0.5) 5(-1.425,-1) 6(1.425,-1) 7(1.425,-0.5) 8(1.425,0) 9(1.425,0.5) 10(1.425,1)
  rect 1.65x2.38 smd: 11(0,0)
  silkscreen extent -2.02,-1.5 1.5,1.65, body extent -1.5,-1.5 1.5,1.5, height 0.75
RV-3049-C3 [mm] "RV-3049-C3"
  rect 0.5x0.8 smd: 1(-1.6,-1.1) 2(-0.8,-1.1) 3(0,-1.1) 4(0.8,-1.1) 5(1.6,-1.1) 6(1.6,1.1) 7(0.8,1.1) 8(0,1.1) 9(-0.8,1.1) 10(-1.6,1.1)
  silkscreen extent -2.26,-1.3 2,1.3, body extent -1.9,-1.3 1.9,1.3, height 0.9
SC70-5 [mm]
  rect 0.45x0.95 smd: 1(-0.65,-1.1) 2(0,-1.1) 3(0.65,-1.1) 4(0.65,1.1) 5(-0.65,1.1)
  silkscreen extent -1.2,-1 1,0.7, body extent -1,-0.7 1,0.7, height 1.1
SC70-6 [mm]
  rect 0.406x0.648 smd: 1(-0.65,-0.95) 2(0,-0.95) 3(0.65,-0.95) 4(0.65,0.95) 5(0,0.95) 6(-0.65,0.95)
  silkscreen extent -1.2,-1 1,0.7, body extent -1,-0.7 1,0.7, height 1.1
SH-7010A [mm] "Rotary Coded Switch, SH-7000 series, 10 positions, real code, J hook"
  rect 2.2x1 smd: 1(-3.25,2.54) 2(3.25,-2.54) 4(-3.25,-2.54) 8(3.25,2.54) C(-3.25,0) C(3.25,0)
  silkscreen extent -3.7,-3.6 3.7,3.6, body extent -3.75,-3.65 3.75,3.65, height 3.77
SH-7050A [mm] "Rotary Coded Switch, SH-7000 series, 16 positions, real code, J hook"
  rect 2.2x1 smd: 1(-3.25,2.54) 2(3.25,-2.54) 4(-3.25,-2.54) 8(3.25,2.54) C(-3.25,0) C(3.25,0)
  silkscreen extent -3.7,-3.6 3.7,3.6, body extent -3.75,-3.65 3.75,3.65, height 3.77
SOT23-3 [mm] "SOT23, 3-Leads, Body 2.9x1.3mm, Pitch 0.95mm, Lead Span 2.3mm, IPC Medium Density"
  rect 1.3x0.6 smd: 1(-1.05,0.95) 2(-1.05,-0.95) 3(1.05,0)
  silkscreen extent -1.17,-1.5 0.7,1.93, body extent -0.7,-1.5 0.7,1.5, height 1.2
SOT23-6 [mm] "SOT23, 6-Leads, Body 2.90x2.45mm, Pitch 0.95mm, IPC Medium Density"
  rect 1.05x0.6 smd: 1(-1.35,0.95) 2(-1.35,0) 3(-1.35,-0.95) 4(1.35,-0.95) 5(1.35,0) 6(1.35,0.95)
  silkscreen extent -1.4,-1.55 0.5,1.92, body extent -0.88,-1.52 0.87,1.53, height 1.45
SOT323 [mm] "SOT323"
  rect 0.7x0.9 smd: 1(-0.65,-0.95) 2(0.65,-0.95) 3(0,0.95)
  silkscreen extent -1.38,-0.71 1.1,0.7, body extent -1.1,-0.7 1.1,0.7, height 1
SOT-363 [mm]
  rect 0.42x0.6 smd: 1(-0.65,-0.95) 2(0,-0.95) 3(0.65,-0.95) 4(0.65,0.95) 5(0,0.95) 6(-0.65,0.95)
  silkscreen extent -1.28,-0.88 1,0.6, body extent -1,-0.6 1,0.6, height 1
TC2030-IDC-NLFP [mil]
  round 31 smd paste-1181.1: 1(-50,-25) 2(-50,25) 3(0,-25) 4(0,25) 5(50,-25) 6(50,25)
  round 0 hole 39 unplated: ""(-100,0) ""(100,-40) ""(100,40)
  Top Layer pour cut-out: -50,25 -50,-25 50,-25 50,25
  silkscreen extent -122,-63 122,63
TDFN-8 [mm] "CYPRESS TDFN-8 (4 x 4.5 x 0.8 mm)"
  oval 0.7x0.5 smd: 1(-1.95,1.425) 2(-1.95,0.475) 3(-1.95,-0.475) 4(-1.95,-1.425) 5(1.95,-1.425) 6(1.95,-0.475) 7(1.95,0.475) 8(1.95,1.425)
  rect 2.7x3.7 smd: 9(0,0)
  silkscreen extent -2.1,-2.3 2,2.3, body extent -2,-2.3 2,2.3, height 0.8
TSOT23-5 [mm] "SOT23, 5-Leads, Body 2.90x2.80mm, Pitch 0.95mm, IPC Medium Density"
  rect 1.22x0.6 smd: 1(-1.31,0.95) 2(-1.31,0) 3(-1.31,-0.95) 4(1.31,-0.95) 5(1.31,0.95)
  silkscreen extent -1.47,-1.45 0.5,1.9, body extent -0.87,-1.45 0.87,1.45, height 1
TSOT-23 [mm] "SOT23, 6-Leads, Body 2.90x2.45mm, Pitch 0.95mm, IPC Medium Density"
  rect 1.22x0.62 smd: 1(-1.31,0.95) 2(-1.31,0) 3(-1.31,-0.95) 4(1.31,-0.95) 5(1.31,0) 6(1.31,0.95)
  silkscreen extent -1.4,-1.45 0.5,1.92, body extent -0.88,-1.45 0.87,1.45, height 1
TSSOP-14 [mm] "TSOP, 14-Leads, Body 5.00x4.40mm, Pitch 0.65mm, IPC Medium Density"
  oval 1.4x0.45 smd: 1(-2.95,1.95) 2(-2.95,1.3) 3(-2.95,0.65) 4(-2.95,0) 5(-2.95,-0.65) 6(-2.95,-1.3) 7(-2.95,-1.95) 8(2.95,-1.95) 9(2.95,-1.3) 10(2.95,-0.65) 11(2.95,0) 12(2.95,0.65) 13(2.95,1.3) 14(2.95,1.95)
  silkscreen extent -3.07,-2.55 1.85,2.85, body extent -3.19,-2.55 3.19,2.55, height 1.1
XH414HG-IV01E [mm] "Seiko instruments XH414HG-IV01E"
  rect 1x1 smd: 1(2.05,2.075)
  rect 4.1x1.7 smd: 2(0.65,-1.85)
  Top Layer region: 2.7,0.3 2.7,2.7 0.3,2.7
  silkscreen extent -2.5,-2.01 2.5,2.5, body extent -2.4,-2.4 2.4,2.4, height 1.85

## Part data
ANT1: "2.45 GHz High Gain SMD Chip Antenna"
B1: "2.45 GHz Balun for TI CC253X"
C1 C2 C3 C14: library part C1608X7R1C105K080AC, "1μF ±10% 16V Ceramic Capacitor X7R 0603"
C4 C5 C16 C44 C45 C46 C47 C49 C50: library part CGB3B1X5R1A475K055AC, "4.7μF ±10% 10V Ceramic Capacitor X5R 0603"
C6 C17 C18 C20 C22 C24 C25 C28 C29 C30 C31 C32 C33 C34 C36 C39 C40: library part GRM155R71C104KA88D, "0.10μF ±10% 16V Ceramic Capacitor X7R 0402"
C7: library part C0603C683K5RACTU, "0.068μF ±10% 50V Ceramic Capacitor X7R 0603"
C8: library part C0603C103J5RACTU, "10000pF ∮5% 50V Ceramic Capacitor X7R 0603"
C9 C10 C11 C12 C13: library part T495X227K016ATE100, "220μF ±10% Molded Tantalum Capacitors 16V"
C15: library part F930J107MAA, "100μF ±20% Molded Tantalum Capacitors 6.3V 1206"
C19: library part XH414HG-IV01E, "80mF (EDLC) Supercapacitor 3.3V Coin"
C21 C26 C27: library part C1608X5R0J106M080AB, "10μF ±20% 6.3V Ceramic Capacitor X5R 0603"
C23: library part 500R07S180GV4T, "18pF ∮2% 50V Ceramic Capacitor C0G, NP0 0402"
C35: library part C0402C221K5RACTU, "220pF ∮10% 50V Ceramic Capacitor X7R 0402"
C37 C38: library part 500R07S120GV4T, "12pF ∮2% 50V Ceramic Capacitor C0G, NP0 0402"
C41 C42: library part 500R07S220GV4T, "22pF ∮2% 50V Ceramic Capacitor C0G, NP0 0402"
C43: library part C1005C0G1H102J050BA, "1000pF ∮5% 50V Ceramic Capacitor C0G, NP0 0402"
C48: library part GRM188C81A106MA73D, "10μF ±20% 10V Ceramic Capacitor X6S 0603"
D1 D3: "1.0A SURFACE MOUNT SCHOTTKY BARRIER RECTIFIER"
D2: "Green 571nm LED Indication - Discrete 2V 0402 (1005 Metric)"
D4: library part CLY6D-FKC-CK1N1D1BB7D3D3, "Red, Green, Blue (RGB) 622nm Red, 530nm Green, 470nm Blue LED Indication - Discrete 2.1V Red, 3V Green, 3V Blue 6-SMD, J-Lead"
D5 D6 D7 D8: "SURFACE MOUNT SCHOTTKY BARRIER DIODE"
D9: library part D_BAS40TW, "SURFACE MOUNT SCHOTTKY BARRIER DIODE ARRAYS"
D10: "Zener Diode 3.6V 150mW ∮5% Surface Mount 0503 (1308 Metric)"
D11: library part SML-P12UTT86, "Red 620nm LED Indication - Discrete 2V 2-SMD"
D12: "Diode Schottky 30V 100mA Surface Mount 0402/SOD-923F"
D13: "Diode Array 1 Pair Common Cathode Standard 75V 150mA Surface Mount SC-70, SOT-323"
L1: library part CDRH2D18/LDNP-100NC, "10μH Shielded Inductor 1A 180 mOhm Max Nonstandard"
P1: "3.5 mm phone jack, 4 terminals"
P2 P3: "2.5 mm phone jack, 4 terminals"
P4 P5: "TC2030-MCP-NL"
Q1: "P-Channel 30-V (D-S) MOSFET"
Q2 Q4: "P-Channel 20 V (D-S) MOSFET"
Q3 Q5: "N-Channel 8 V (D-S) MOSFET"
Q6 Q7 Q8 Q9: "N-Channel 30 V (D-S) MOSFET"
Q10 Q11: "DUAL N-CHANNEL ENHANCEMENT MODE MOSFET"
Q12: "Dual P-Channel 12 V (D-S) MOSFET"
Q13 Q14 Q15: "Load Switch with Level-Shift"
R1 R20: library part CRCW0402910RFKED, "RES SMD 910 OHM 1% 1/16W 0402"
R2 R3 R12 R13 R34 R36: library part CRCW040247K0FKED, "RES SMD 47K OHM 1% 1/16W 0402"
R4 R14 R15 R30 R32 R37 R40 R42 R43 R48 R49 R50 R51 R52 R53: library part CRCW04021M00FKED, "RES SMD 1M OHM 1% 1/16W 0402"
R5 R11 R28 R31 R33: library part CRCW0402100KFKED, "RES SMD 100K OHM 1% 1/16W 0402"
R6 R26: library part CRCW0402110RFKED, "RES SMD 110 OHM 1% 1/16W 0402"
R7: library part CRCW0402220RFKED, "RES SMD 220 OHM 1% 1/16W 0402"
R8 R22: library part CRCW0402324RFKED, "RES SMD 324 OHM 1% 1/16W 0402"
R9 R10 R17 R18 R19: library part CRCW040210K0FKED, "RES SMD 10K OHM 1% 1/16W 0402"
R16: library part RTAN0805BKE20R0, "RES SMD 20 OHM 0.1% 1/5W 0805"
R21: library part RT0402DRD0748K7L, "RES SMD 48.7K OHM 0.5% 1/16W 0402"
R23: library part RC0402FR-0724K3L, "RES SMD 24.3K OHM 0.5% 1/16W 0402"
R24: library part CRCW040220R0FKED, "RES SMD 20 OHM 1% 1/16W 0402"
R25: library part CRCW040212K1FKED, "RES SMD 12.1K OHM 1% 1/16W 0402"
R27: library part RC0402FR-075K76L, "RES SMD 5.76K OHM 0.5% 1/16W 0402"
R29: library part CRCW04022M00FKED, "RES SMD 2M OHM 1% 1/16W 0402"
R35: library part CRCW0402100RFKED, "RES SMD 100 OHM 1% 1/16W 0402"
R41 R45: library part CRCW04022K20FKED, "RES SMD 2.2K OHM 1% 1/16W 0402"
R44: library part CRCW04020000Z0EDHP, "RES SMD 0.0 OHM JUMPER 1/5W 0402"
R46: library part CRCW040256K0FKED, "RES SMD 56K OHM 1% 1/16W 0402"
R47: library part CRCW0402470KJNED, "RES SMD 470K OHM 5% 1/16W 0402"
SW1 SW2 SW3: "ROTARY CODED SWITCHES"
SW4: "3.5 mm⊙2.9 mm Side-operational SMD  Light Touch Switches"
U1: library part LTC3200ES6-5#TRMPBF, "Low Noise, Regulated   Charge Pump DC/DC Converters"
U2: "Miniature Single-Cell, Fully Integrated Li-Ion,  Li-Polymer Charge Management Controllers"
U3: "Voltage Level Shifting GPIO  with LED Driver and Keypad Engine"
U4: "Piezoelectric Energy Harvesting Power Supply"
U5: "256-Kbit (32 K ⊙ 8) Serial (SPI) F-RAM"
U6: "1 pC Charge Injection, 100 pA Leakage  CMOS  5 V/5 V/3 V 4-Channel Multiplexer"
U7: "Micro-Power (50uA), Zero-Drift, Rail-to-Rail Out  Instrumentation Amplifier"
U8: "0.9 μA, High Precision Op Amps"
U9: "Rail-to-rail 0.9 V nanopower comparator"
U10: "A Powerful System-On-Chip for 2.4-GHz IEEE 802.15.4, 6LoWPAN  and ZigBee Applications"
U11 U13: "Ultralow Noise, 200 mA,  CMOS Linear Regulator"
U12: "Low Loss PowerPath Controller in ThinSOT"
Y1: "Real Time Clock Module with SPI-Bus"
Y2: "MHz Range Crystal Unit"
Y3: "32768 Hz SMD Low profile crystal"

## Free pads (board coordinates)
  round 85 hole 60: ""(2740,1130) ""(3560,1130)
  round 70 hole 50: ""(3150,1130)
  rrect50% 85x85 smd: ""(4525,1820) ""(4525,1980)
  rect 65x40 smd far side: ""(4535,1170) ""(4535,1270) ""(4535,1370) ""(4535,1470) ""(4535,1570) ""(4535,1670)

## Via types
v1: diameter 20, hole 8, Top Layer to Bottom Layer, 154 vias
v2: diameter 24, hole 12, Top Layer to Bottom Layer, 66 vias
v3: diameter 22, hole 8, Top Layer to Bottom Layer, 14 vias
v4: diameter 21.65, hole 8, Top Layer to Bottom Layer, 2 vias

## Nets (pads, with @x,y where several pads share a name; then routed paths per layer and width w, separated by ;. In a path a pad name is that pad's centre, name@x,y a point inside that pad or via, vN(x,y) a via of type N, cw(c..) or ccw(c..) an arc to the next point about the centre after c; other vN are vias at no path point)
BATTERYPACKDETECT: R5.2 U10.52 | length 1276.3
  Top Layer w8: v1(1690,1720) 1712.28,1720 R5.2@1715,1722.72 ; U10.52@2503.54,1634.21 2559.21,1634.21 v1(2565,1640)
  Signal Layer 2 w8: v1(1690,1720) 1700,1730 2030.2,1730 2214.97,1914.77 2440.23,1914.77 2600,1755 2600,1675 v1(2565,1640)
BATTERYPACKPOWER: C6.1 Q13.2 Q13.3 R5.1 R6.1 R7.1 R8.1 R9.1 R10.1 R11.1 U3.4 U3.12 U3.18 | length 2685.1
  Top Layer w8: R5.1@1715,1687.28 R9.1@1780,1687.28 R10.1@1820,1687.28 v1(1847.72,1687.28) ; v1(1845,1555) 1850,1550 U3.18@1877.24,1550 ; R11.1@1862.28,1425 1845,1407.72 v1(1845,1355) 1845,1215 1857.72,1202.28 R8.1@1870,1202.28 R7.1@1910,1202.28 R6.1@1950,1202.28 ; v1(1930,1695) 1930,1682.28 C6.1@1942.28,1670 1939.25,1666.97 U3.12@1939.25,1627.76 ; U3.4@2032.76,1550 2066.72,1550 2071.72,1555 2080,1555 v1(2089.22,1564.22)
  Top Layer w12: Q13.3@3552.6,1689.41 3552.01,1690 v2(3520,1690) 3520,1715 Q13.2@3552.6,1715
  VCC w12: v1(1845,1355) 1853.46,1346.54 2101.54,1346.54 2118,1363 2294.11,1363 2304.11,1373 3448,1373 3520,1445 v2(3520,1690)
BLD_CTRL: P5.5 U10.18 | length 714.4
  Top Layer w8: P5.5@2005,1990 2005,2015 ccw(c1985,2015) 1985,2035 1941.26,2035 ccw(c1941.26,2015) 1921.26,2015 1921.26,1893.74 ccw(c1935,1893.74) 1935,1880 2075,1880 cw(c2075,1824) 2131,1824 2131,1694 2171.1,1653.9 U10.18@2196.46,1653.9
BLD_RX: P5.4 U10.16 | length 319.8
  Top Layer w8: P5.4@2055,1940 2060,1940 v1(2100,1900) ; v1(2165,1730) 2165,1705 2176.73,1693.27 U10.16@2196.46,1693.27
  Bottom Layer w8: v1(2100,1900) 2100,1795 v1(2165,1730)
BLD_TX: P5.3 U10.17 | length 623.4
  Top Layer w8: P5.3@2055,1990 2055,2020 cw(c2070,2020) 2070,2035 2200,2035 cw(c2200,2015) 2220,2015 2220,1885 2145,1810 2145,1700 2171.42,1673.58 U10.17@2196.46,1673.58
CC2538_RF_N: B1.3 U10.38 | length 156
  Top Layer w8: U10.38@2399.21,1431.46 2399.21,1415.65 2398.37,1414.8 2398.37,1302.81 ccw(c2415.59,1302.81) B1.3@2415.59,1285.59
CC2538_RF_P: B1.4 U10.37 | length 155.3
  Top Layer w8: B1.4@2364.41,1285.59 ccw(c2364.41,1301.55) 2380.37,1301.55 2380.37,1414.8 2379.53,1415.65 U10.37@2379.53,1431.46
CT1: D6.3 D8.3 pad.@2740,1130 U4.2 | length 2366.4
  Top Layer w12: pad.@2740,1130 2740,1117 ccw(c2840,1117) 2840,1017 3587,1017 ccw(c3587,1085) 3655,1085 3655,1405 cw(c3680,1405) 3680,1430 ccw(c3680,1455.32) 3705.32,1455.32 U4.2@3705.32,1478.9 ; pad.@2750,1140 2855,1245 2985,1245 cw(c2985,1195) 3035,1195 3035,1120 ccw(c3085,1120) 3085,1070 3330,1070 ccw(c3330,1115) 3375,1115 D8.3@3375,1208.66
CT2: D5.3 D7.3 pad.@3560,1130 U4.1 | length 1295.1
  Top Layer w12: D5.3@2965,1223.66 D5.3@2965,1203.66 2965,1145 ccw(c3065,1145) 3065,1045 3475,1045 ccw(c3475,1130) pad.@3560,1130 ; D7.3@3520,1208.66 3520,1170 pad.@3560,1130 ; U4.1@3685.63,1478.9 ccw(c3685.63,1430.27) 3637,1430.27 3637,1207 cw(c3560,1207) pad.@3560,1130
CURRENT_WAVEFORM: pad.@4535,1370 U7.6 U10.19 | length 3266.1
  Top Layer w8: v1(2110.2,1729.8) 2110.2,1695 2170.99,1634.21 U10.19@2196.46,1634.21
  Top Layer w12: v2(3065,1735) 3092.2,1762.2 U7.6@3117.68,1762.2
  Signal Layer 2 w12: v1(2110.2,1729.8) 2225,1615 2225,1510 2285,1450 3020,1450 3050,1480 3050,1720 v2(3065,1735)
  Bottom Layer w12: v2(3065,1735) 3065,1660 3115,1610 3555,1610 3795,1370 pad.@4535,1370
CURRENTMEASUREEN: Q6.1 Q7.1 Q8.1 Q9.1 Q14.5 R52.1 U10.13 | length 2460.5
  Top Layer w8: U10.13@2241.73,1738.54 2241.73,1826.73 v1(2250,1835) ; v1(2857.4,1557.6) Q8.1@2857.4,1596.34 ; v1(3000,1560) 3000,1593.94 Q7.1@3002.4,1596.34 ; v1(3410,1565) 3412.4,1567.4 Q6.1@3412.4,1601.34 ; v1(3560,1565) 3557.4,1567.6 Q9.1@3557.4,1601.34 3575.35,1619.29 3575.35,1940.35 v1(3590,1955) Q14.5@3625,1955 ; 3600,1960 3600,2012.28 R52.1@3607.72,2020
  Signal Layer 2 w8: v1(2250,1835) 2250,1715 2270,1695 2440,1695 2465,1670 2465,1535 2510,1490 2774,1490 2841.6,1557.6 v1(2857.4,1557.6)
  Bottom Layer w12: v1(2857.4,1557.6) 2884,1531 3029,1531 ; v1(3000,1560) 3029,1531 ; v1(3410,1565) 3376,1531 ; v1(3560,1565) 3526,1531 3376,1531 ; 3029,1531 3376,1531
EXT_VOLT_SEL: P1.2 U10.49 | length 2832.4
  Top Layer w8: P1.2@1190,1995 v1(1270,1995) ; U10.49@2503.54,1575.16 2610.16,1575.16 v1(2635,1600)
  Bottom Layer w8: v1(1270,1995) 1270,1710 1110,1550 1110,1290 1160,1240 2078.08,1240 2140,1301.92 2140,1335 2170,1365 2540,1365 2680,1505 2680,1565 2645,1600 v1(2635,1600)
EXT_VOLT_WAVE: P1.3 U10.21 | length 957.8
  Top Layer w8: v1(2100,1615) 2118,1597 2194.3,1597 U10.21@2196.46,1594.84
  Top Layer w12: P1.3@1296.3,1716.85 1298.15,1715 v2(1350,1715)
  Signal Layer 2 w12: v2(1350,1715) 1350,1720 1430,1640 2035,1640 2060,1615 v1(2100,1615)
G1: Q12.5 U12.5 | length 194.3
  Top Layer w10: Q12.5@4420.45,1640 Q12.5@4422.4,1640 v2(4453.05,1640) ; U12.5@4434.63,1525 U12.5@4436.57,1525 v2(4473.05,1525)
  Bottom Layer w12: v2(4453.05,1640) 4453.05,1545 v2(4473.05,1525)
G2: Q12.2 R47.2 U12.4 | length 434.1
  Top Layer w10: v2(4318.05,1640) Q12.2@4345.65,1640 ; v2(4435,1460) 4435,1486.02 U12.4@4436.57,1487.6 4495.65,1487.6 4515.77,1507.72 R47.2@4515.77,1570
  Bottom Layer w12: v2(4318.05,1640) 4318.05,1576.95 v2(4435,1460)